# EAGLE board board1_v2 (EAGLE 7.1.0)
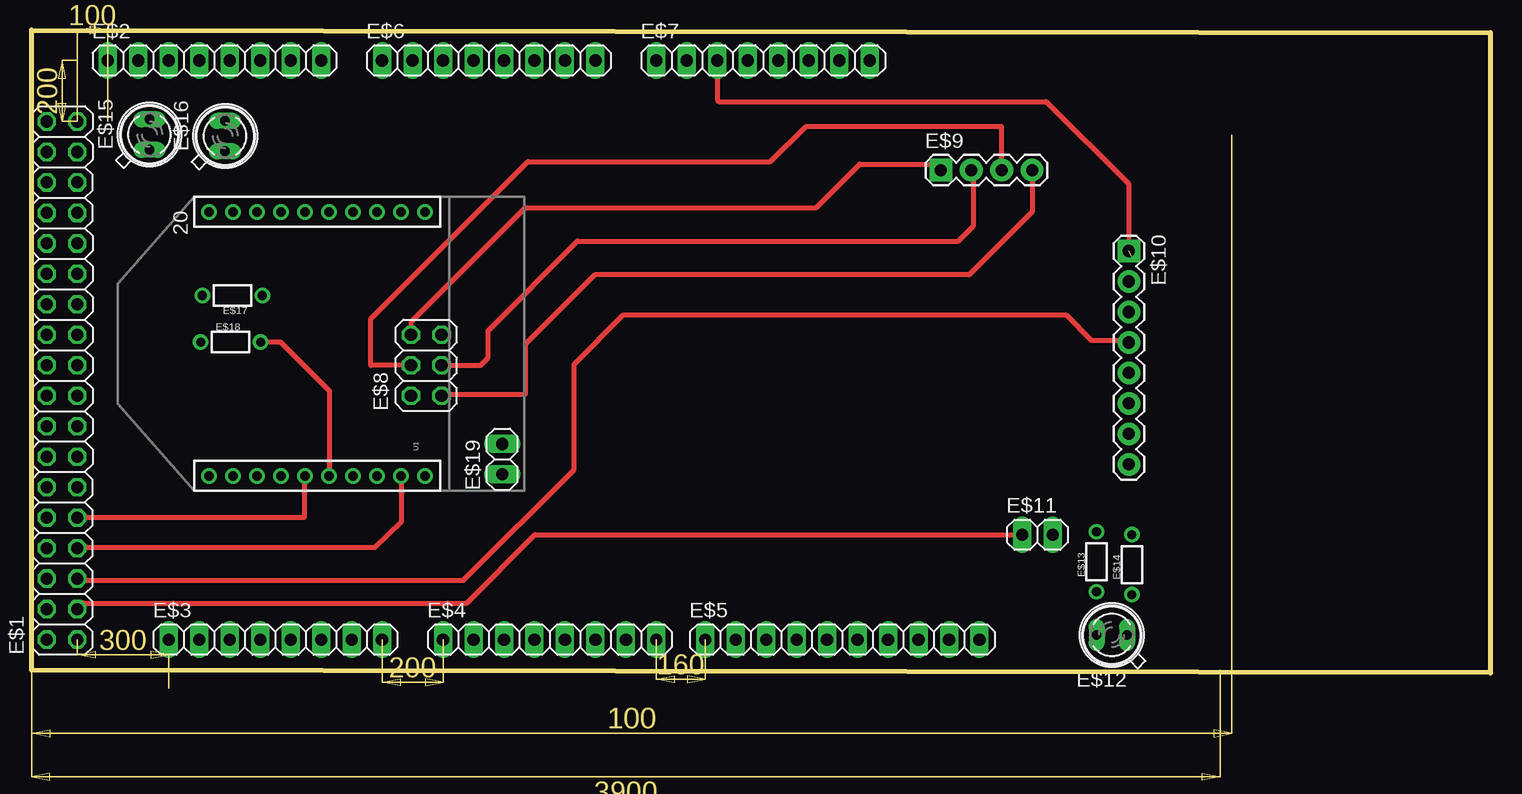
[diagram p0: board, top side]
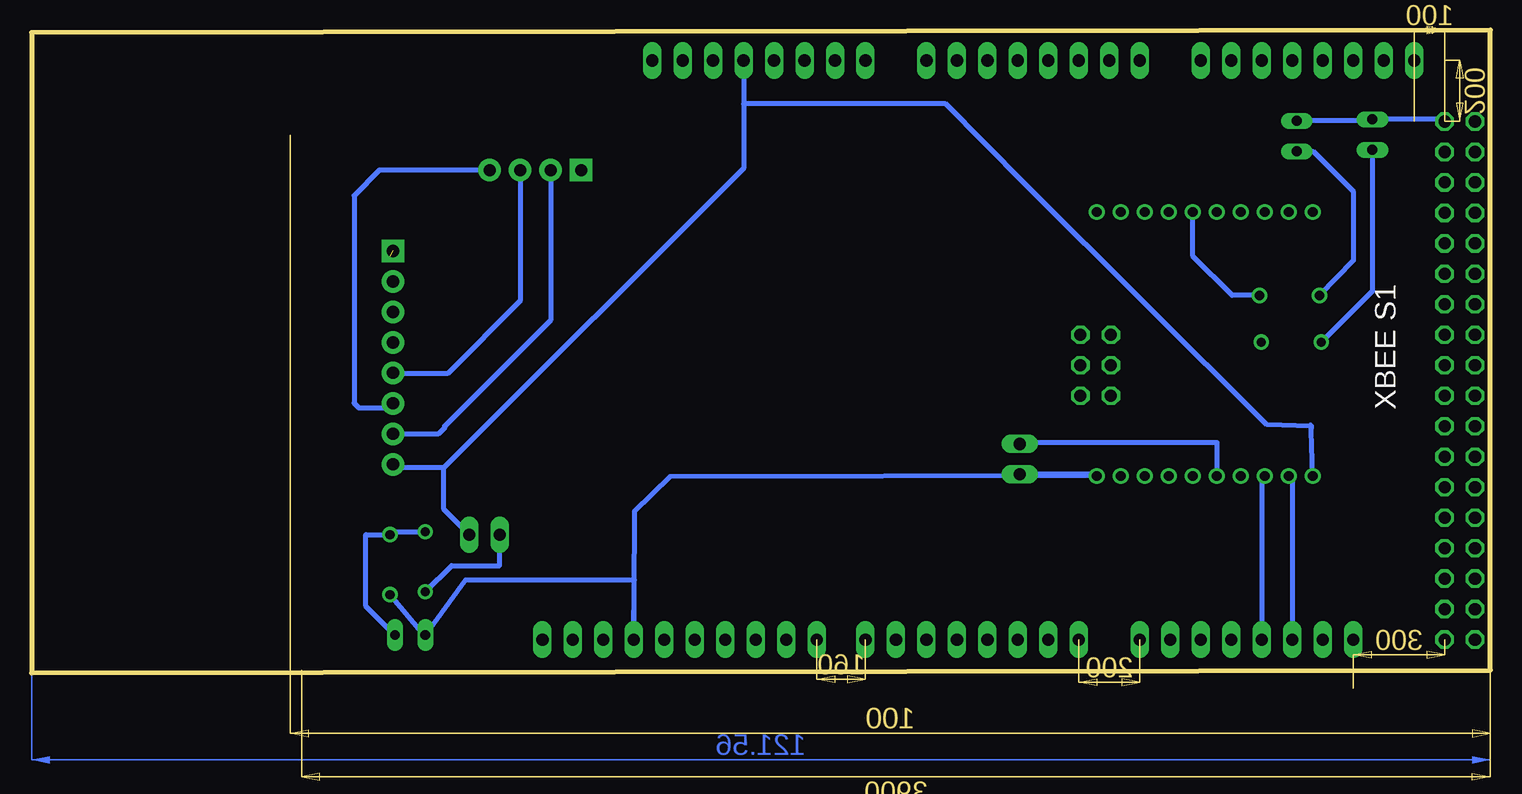
[diagram p1: board, bottom side, seen from below]

Size 121.56 x 53.57 mm. Coordinates in mm from the lower left corner, seen from the top.
Outline: 121.56,0 0,0.23 0,53.57 121.56,53.34 121.56,0
Copper layers (1*16): Top 0.035mm / dielectric 1.5mm / Bottom 0.035mm
Design rules "default": minimum track width 10mil, minimum drill 24mil, track to track 8mil, track to pad 8mil, pad to pad 8mil, via to via 8mil, smd to smd 8mil, copper to edge 40mil, drill to drill 8mil, minimum pad ring 10mil, minimum via ring 8mil, stop-mask expansion 4mil, vias tented up to drill 0mil, thermal gap 10mil
Net classes: 0 default: width 0.254 mm
Milling: area 2.2,45.9 to 2.8,47.4; area 2.2,49.5 to 2.8,51; area 0.5,46.5 to 2.1,50.5; area 3.8,53.3 to 5.3,53.9; area 4.8,53.3 to 6.3,53.9; area 3.1,54 to 7,55.6; area 3.8,1.2 to 5.3,1.8; area 9.9,1.2 to 11.4,1.8; area 5.7,1.9 to 9.6,3.6; area 29.2,-1.1 to 30.7,-0.5; area 32.8,-1.1 to 34.3,-0.5; area 29.8,-0.4 to 33.7,1.3; area 52.1,-0.8 to 53.6,-0.2; area 54.6,-0.8 to 56.1,-0.2; area 52.1,-0.1 to 56.1,1.5; area 97.6,-9 to 99.1,-8.4; area 0,-9 to 1.5,-8.4; area 46.9,-10.7 to 52.1,-9.1; 18 lines

## Footprints (pad centres in the part's own frame; a part is rotated, then mirrored left to right if it is on the bottom)
2X18 = drill 1.016 octagon: 1 -21.59,-1.27; 2 -21.59,1.27; 3 -19.05,-1.27; 4 -19.05,1.27; 5 -16.51,-1.27; 6 -16.51,1.27; 7 -13.97,-1.27; 8 -13.97,1.27; 9 -11.43,-1.27; 10 -11.43,1.27; 11 -8.89,-1.27; 12 -8.89,1.27; 13 -6.35,-1.27; 14 -6.35,1.27; 15 -3.81,-1.27; 16 -3.81,1.27; 17 -1.27,-1.27; 18 -1.27,1.27; 19 1.27,-1.27; 20 1.27,1.27; 21 3.81,-1.27; 22 3.81,1.27; 23 6.35,-1.27; 24 6.35,1.27; 25 8.89,-1.27; 26 8.89,1.27; 27 11.43,-1.27; 28 11.43,1.27; 29 13.97,-1.27; 30 13.97,1.27; 31 16.51,-1.27; 32 16.51,1.27; 33 19.05,-1.27; 34 19.05,1.27; 35 21.59,-1.27; 36 21.59,1.27
1X08 = drill 1.016 long: 1 -8.89,0; 2 -6.35,0; 3 -3.81,0; 4 -1.27,0; 5 1.27,0; 6 3.81,0; 7 6.35,0; 8 8.89,0
1X10 = drill 1.016 long: 1 -11.43,0; 2 -8.89,0; 3 -6.35,0; 4 -3.81,0; 5 -1.27,0; 6 1.27,0; 7 3.81,0; 8 6.35,0; 9 8.89,0; 10 11.43,0
2X03 = drill 1.016 octagon: 1 -2.54,-1.27; 2 -2.54,1.27; 3 0,-1.27; 4 0,1.27; 5 2.54,-1.27; 6 2.54,1.27
1X04 = drill 1.016 pad 1.88 square: 1 0,0 | drill 1.016 pad 1.88: 2 2.54,0; 3 5.08,0; 4 7.62,0
1X08' = drill 1.016 pad 1.88 square: 1 0,0 | drill 1.016 pad 1.88: 2 2.54,0; 3 5.08,0; 4 7.62,0; 5 10.16,0; 6 12.7,0; 7 15.24,0; 8 17.78,0
1X02 = drill 1.016 long: 1 -1.27,0; 2 1.27,0
SFH480 = drill 0.813 long: A 1.27,0; K -1.27,0
1/6W-RES = drill 0.762: 1 -2.5,0; 2 2.5,0
XBEE-1 = drill 0.8: 1 -11,20; 2 -11,18; 3 -11,16; 4 -11,14; 5 -11,12; 6 -11,10; 7 -11,8; 8 -11,6; 9 -11,4; 10 -11,2; 11 11,2; 12 11,4; 13 11,6; 14 11,8; 15 11,10; 16 11,12; 17 11,14; 18 11,16; 19 11,18; 20 11,20

## Placement (x,y rotation side)
E$1  [2X18]  2.54,24.36 90 top
E$2  [1X08]  15.24,51.03 0 top
E$3  [1X08]  20.32,2.77 0 top
E$4  [1X08]  43.18,2.77 0 top
E$5  [1X10]  67.56,2.77 0 top
E$6  [1X08]  38.1,51.03 0 top
E$7  [1X08]  60.96,51.03 0 top
E$8  [2X03]  32.89,25.63 90 top
E$9  [1X04]  75.77,41.88 0 top
E$10  [1X08']  91.44,35.15 270 top
E$11  [1X02]  83.82,11.51 0 top
E$12  [SFH480]  90.02,3.15 180 top
E$13  [1/6W-RES]  88.75,9.25 90 top
E$14  [1/6W-RES]  91.69,9.02 90 top
E$15  [SFH480]  9.83,44.86 90 top
E$16  [SFH480]  16.13,44.73 90 top
E$17  [1/6W-RES]  16.74,31.45 180 top
E$18  [1/6W-RES]  16.59,27.56 0 top
E$19  [1X02]  39.22,17.81 90 top
U1  XBEE  [XBEE-1]  34.8,27.41 90 top

## Library data of the parts
E$1-E$8 E$11 E$19 = pinhead
E$9 E$10 = SparkFun-Connectors
E$12 E$15 E$16 = led
E$13 E$14 E$17 E$18 = SparkFun-Passives
U1 = SparkFun

## Nets
S$1: E$7.5 E$10.8 E$11.2 U1.1
S$3: E$7.3 E$10.1
S$5: E$3.4 U1.3
S$6: E$3.3 U1.2
S$7: E$1.3 E$11.1 E$13.1
S$8: E$8.1 E$9.4 E$10.6
S$9: E$8.3 E$9.2 E$10.7
S$10: E$19.2 U1.5
S$11: E$8.6 E$9.1
S$12: E$8.4 E$9.3 E$10.5
S$13: E$10.4
S$14: U1.9
S$15: E$5.7 E$12.A E$14.1 E$19.1 U1.10
S$16: E$12.K E$13.2 E$14.2
S$17: E$1.5
S$18: E$1.35 E$15.A E$16.A
S$19: E$17.1 U1.15
S$21: E$16.K E$17.2
S$22: E$15.K E$18.1
S$23: E$18.2 U1.6

## Tracks (layer width: path | path; a pad name or v marks a point on that pad's centre or on a via)
S$1
  Bottom 0.406: U1.1 14.94,20.19 14.91,20.4 14.99,20.65 14.91,20.55 18.62,20.68 38.79,40.77 45.39,47.42 62.23,47.42 | E$7.5 62.23,47.42 | 62.23,47.42 62.23,42.04 87.2,17.07 | 87.2,17.07 91.14,17.07 E$10.8 | 87.2,17.07 87.2,13.61 E$11.2 85.33,11.75
S$3  (1 unrouted)
  Top 0.406: 57.12,51 E$7.3 57.15,47.73 57.28,47.6 84.56,47.6 91.42,40.74 91.42,34.98 91.69,34.7
S$5
  Bottom 0.406: U1.3 19.05,16.41 E$3.4
S$6
  Bottom 0.406: U1.2 16.51,16.41 E$3.3
S$7
  Top 0.406: E$1.3 4.32,5.82 36.25,5.82 41.94,11.51 E$11.1
  Bottom 0.406: E$13.1 86.55,8.94 82.55,8.94 E$11.1
S$8
  Top 0.406: E$9.4 83.39,38.43 78.13,33.17 46.91,33.17 41.12,27.38 41.12,23.19 34.27,23.19 E$8.1
  Bottom 0.406: E$9.4 92.58,41.88 94.69,39.78 94.69,22.48 94.28,22.07 91.82,22.07 E$10.6
S$9
  Top 0.406: E$8.3 37.41,25.63 38.05,26.26 38.05,28.52 45.49,35.97 77.22,35.97 78.51,37.26 78.51,41.68 E$9.2
  Bottom 0.406: E$9.2 78.31,29.39 87.15,20.55 87.15,20.42 87.68,19.89 91.42,19.89 E$10.7
S$10
  Top 0.406: 22.81,16.4 U1.5 22.76,16.37 22.76,12.98 3.73,12.95
  Bottom 0.406: E$19.2 39.09,19.2 22.78,19.2 22.8,19.19 U1.5
S$11
  Top 0.406: E$8.6 31.62,29.26 41.12,38.76 65.38,38.76 69.01,42.39 75.26,42.39 E$9.1
S$12
  Top 0.406: E$8.4 28.3,25.63 28.27,25.6 28.27,29.52 41.35,42.6 61.57,42.6 64.57,45.54 80.82,45.54 80.82,41.91 E$9.3
  Bottom 0.406: E$9.3 80.85,30.99 86.89,24.94 91.39,24.94 E$10.5
S$13
  Top 0.406: 3.73,7.72 35.99,7.7 45.21,16.94 45.21,25.7 49.33,29.82 86.21,29.82 88.32,27.71 91.26,27.71 E$10.4
S$14
  Top 0.406: 30.79,16.39 U1.9 30.8,12.54 28.6,10.44 3.79,10.44
S$15
  Bottom 0.406: 71.37,6.38 71.32,13.44 68.36,16.36 U1.10 32.93,16.54 E$19.1 | 71.37,6.45 71.37,6.38 | 71.37,6.38 E$5.7 71.32,7.72 85.42,7.72 E$12.A 88.85,3.15 E$14.1
S$16
  Bottom 0.406: E$12.K 93.7,5.56 93.7,11.51 93.69,11.52 E$14.2 91.47,11.75 E$13.2
S$17
  Top 0.406: 3.91,7.75 E$1.5
S$18
  Bottom 0.406: E$1.35 3.99,46.13 E$15.A 9.96,46 E$16.A
S$19
  Bottom 0.406: E$17.1 21.51,31.45 24.79,34.72 U1.15
S$21
  Bottom 0.406: E$16.K 14.76,43.46 11.43,40.13 11.4,34.38 E$17.2
S$22
  Bottom 0.406: E$15.K 9.83,31.82 E$18.1
S$23
  Top 0.406: U1.6 24.84,16.45 24.84,23.47 20.75,27.56 E$18.2
(copper drawn outside any net)
  shapes: Bottom area x1

## Text on the board
tPlace: 20
bNames: XBEE S1
tTest: GND | SCK | MOSI | MISO | GND | SS | MOSI | SCK | MOSI | MISO | MISO | SCK | 3.3V | DOUT | DIN | RST | 3.3V | GND | SLEEP | SS